# Altium PCB DoubleBLDC.PcbDoc
Units mm, origin at the board's own origin, x right, y up, seen from the top; angles counter-clockwise.
Board outline 158.11 x 143.13 mm, 2 copper layers (Top Layer, Bottom Layer); 105 components, 104 nets, 426 pads, 60 vias.
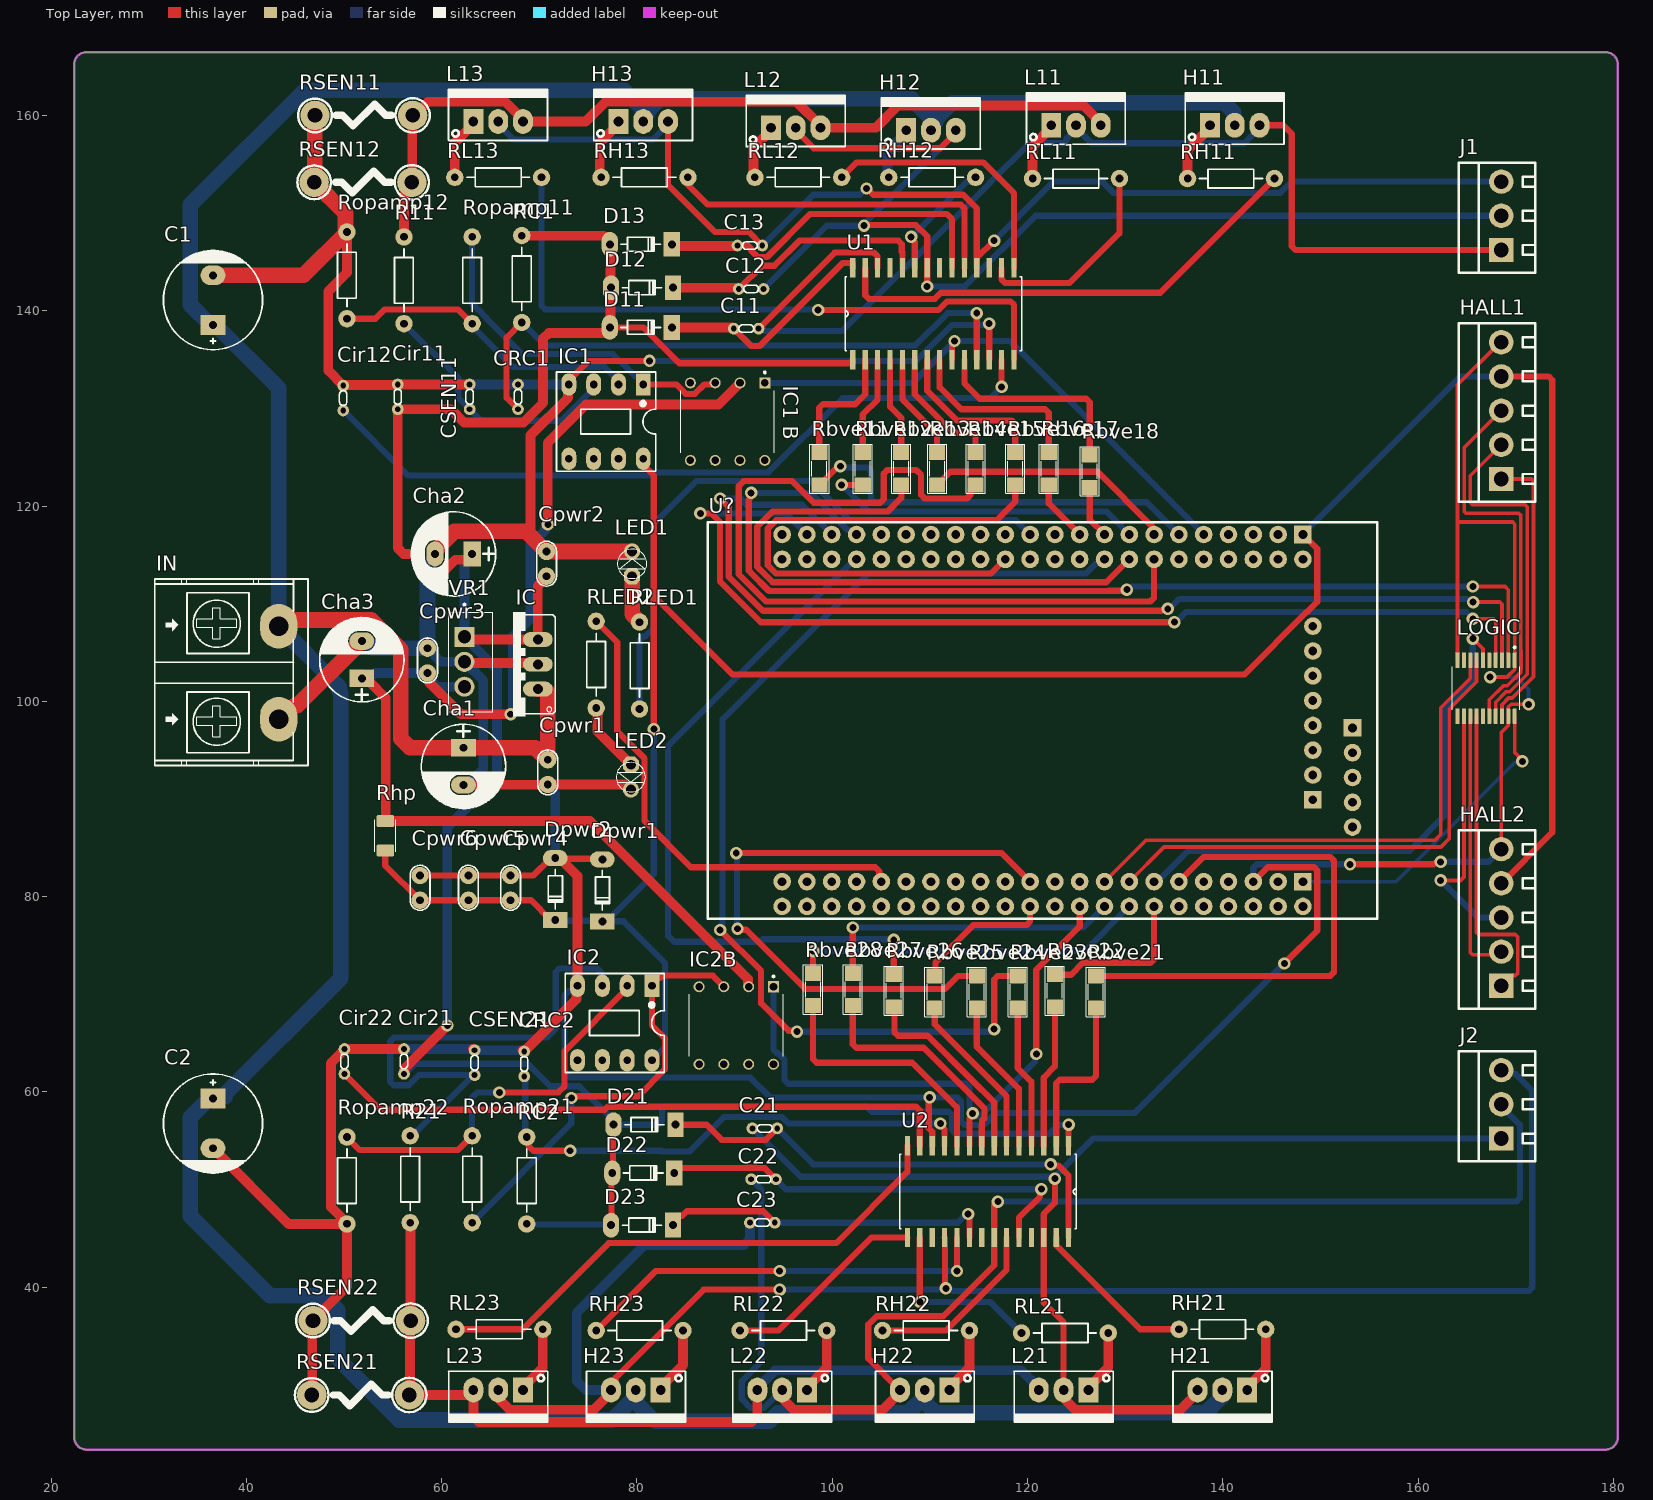
[diagram p0: Top Layer view]
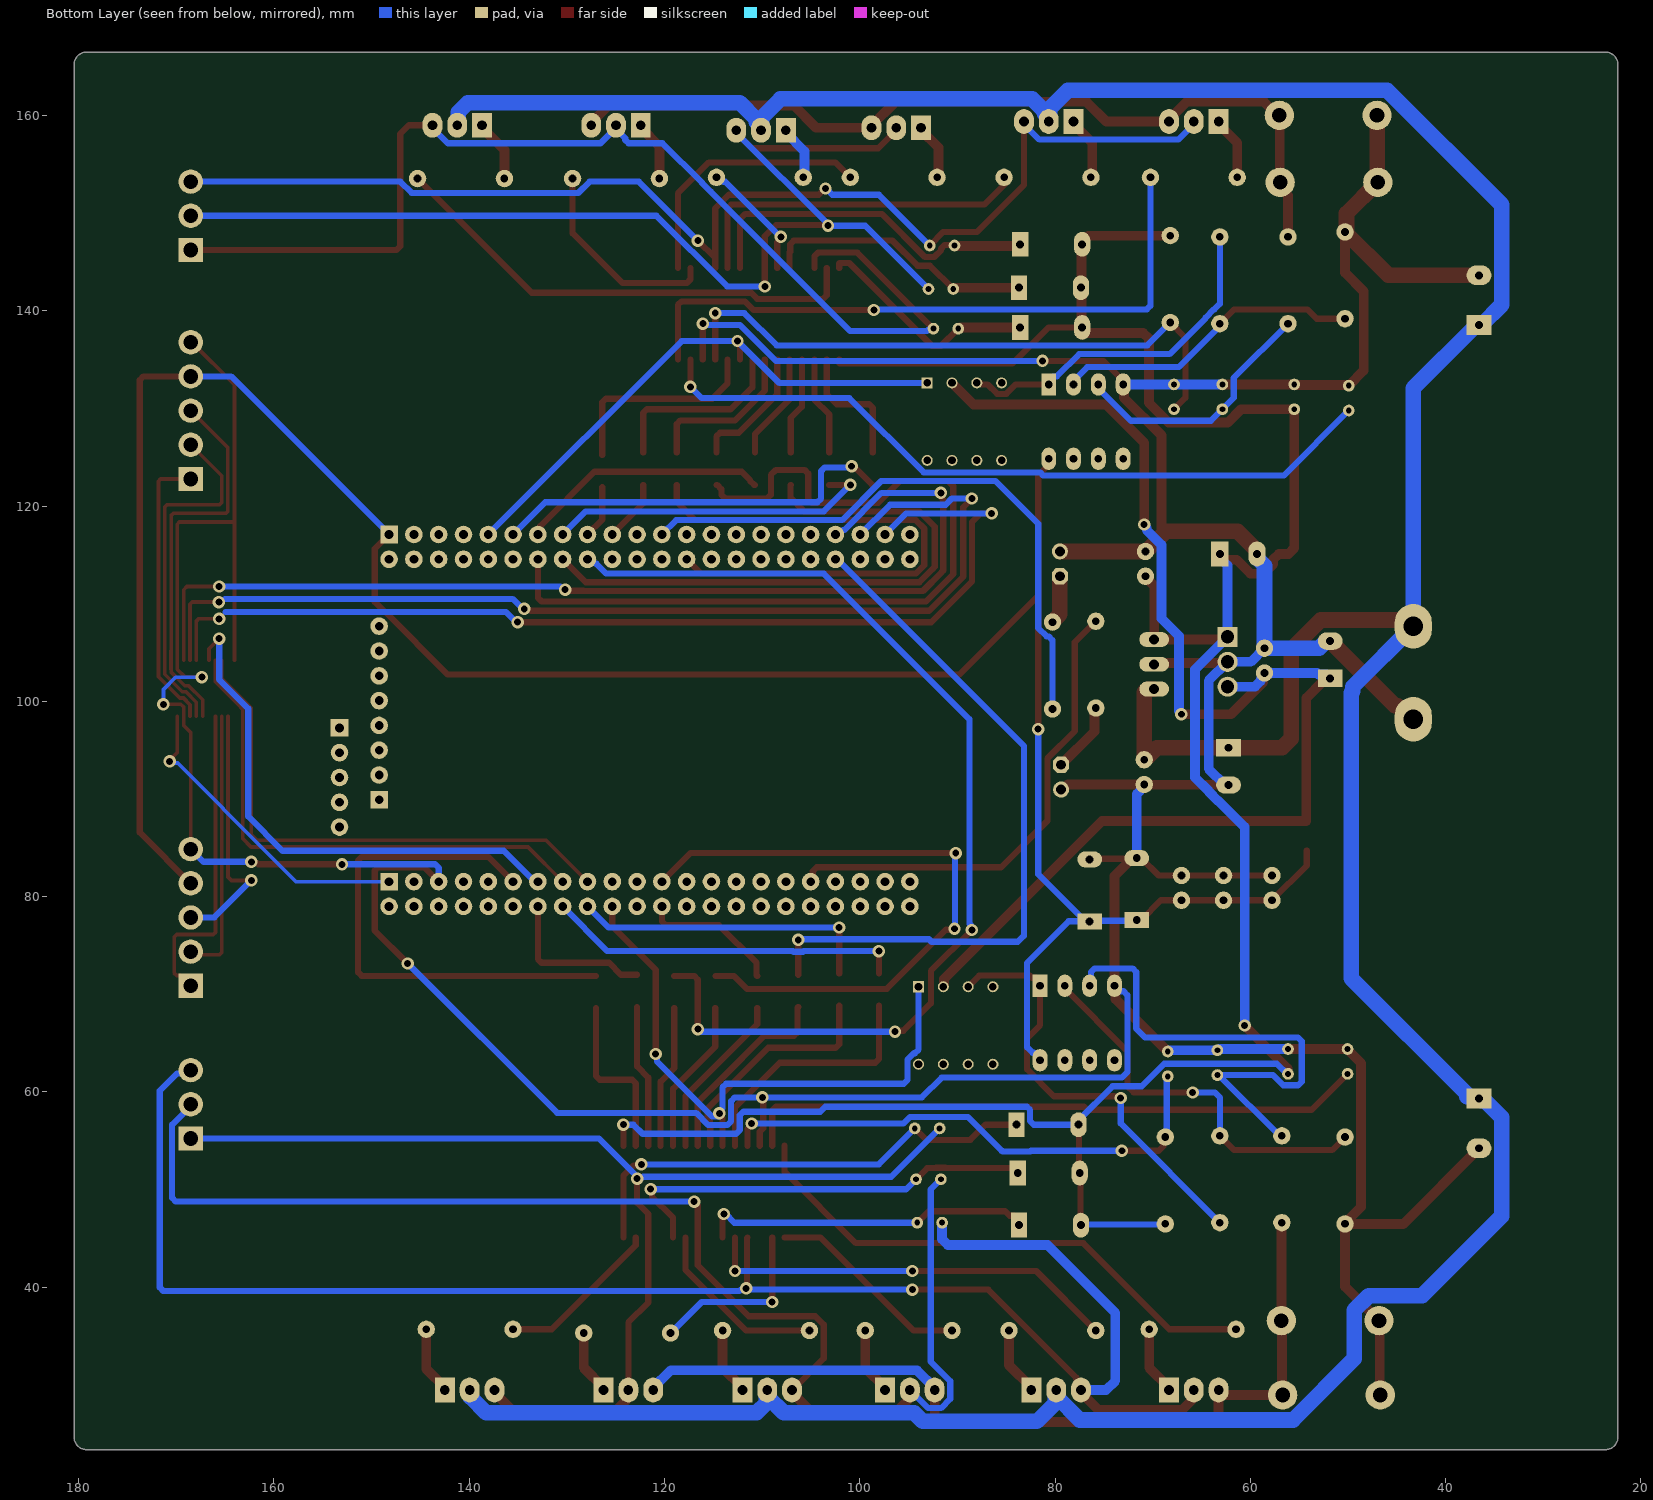
[diagram p1: Bottom Layer view, seen from below]

## Layer stack, top to bottom
Top Solder: solder mask 0.0102, Solder Resist, Dk 3.5
Top Layer: signal copper 0.0356
Dielectric 1: dielectric 0.32, FR-4, Dk 4.8
Bottom Layer: signal copper 0.0356
Bottom Solder: solder mask 0.0102, Solder Resist, Dk 3.5

## Board outline
22.352,24.638 22.352,165.227 cw(c23.622,165.227) 23.622,166.497 179.197,166.497 cw(c179.197,165.227) 180.467,165.227 180.467,24.638 cw(c179.197,24.638) 179.197,23.368 23.622,23.368 cw(c23.622,24.638)

## Design rules (kind name [scope] priority, off if disabled: settings)
Clearance [All] p1: gap=0.254 ignorepadtopadclearanceinfootprint=TRUE
PolygonConnect [All] p1: connectstyle=Relief reliefconductorwidth=0.254 reliefentries=4 polygonreliefangle="90 Angle" airgapwidth=0.254
RoutingVias [All] p1: holewidth=0.711 width=1.27 viastyle="Through Hole" minholewidth=0.711 minwidth=1.27 maxholewidth=0.711 maxwidth=1.27
SolderMaskExpansion [All] p1: expansion=0.102 istentingtop=FALSE
SupplyNets "Schematic Supply Nets" [InNet('GND')] p1: voltage=0.000
Width [All] p1: maxlimit=1.6 minlimit=0.254 preferedwidth=1.6
30 further rules are at their usual default settings.

## Classes and differential pairs
net class "SENSE Motor 2[1..3]": "SENSE Motor 21" "SENSE Motor 22" "SENSE Motor 23"
net class "SENSE Motor 1[1..3]": "SENSE Motor 11" "SENSE Motor 12" "SENSE Motor 13"
net class "Motor 2[1..9]": "Motor 21" "Motor 22" "Motor 23" "Motor 24" "Motor 25" "Motor 26" "Motor 27" "Motor 28" "Motor 29"
net class "Motor 1[1..9]": "Motor 11" "Motor 12" "Motor 13" "Motor 14" "Motor 15" "Motor 16" "Motor 17" "Motor 18" "Motor 19"
component class VĐK: LOGIC U?
component class Power: Cha1 Cha2 Cha3 Cpwr1 Cpwr2 Cpwr3 Cpwr4 Cpwr5 Cpwr6 Dpwr1 Dpwr2 IC IN Rhp VR1
component class Motor2: C2 C21 C22 C23 Cir21 Cir22 CRC2 CSEN21 D21 D22 D23 H21 H22 H23 HALL2 IC2 IC2B J2 L21 L22 L23 LED2 R21 Rbve21 Rbve22 Rbve23 Rbve24 Rbve25 Rbve26 Rbve27 Rbve28 RC2 RH21 RH22 RH23 RL21 RL22 RL23 RLED2 Ropamp21 Ropamp22 RSEN21 RSEN22 U2
component class Motor1: C1 C11 C12 C13 Cir11 Cir12 CRC1 CSEN11 D11 D12 D13 H11 H12 H13 HALL1 IC1 "IC1 B" J1 L11 L12 L13 LED1 R11 Rbve11 Rbve12 Rbve13 Rbve14 Rbve15 Rbve16 Rbve17 Rbve18 RC1 RH11 RH12 RH13 RL11 RL12 RL13 RLED1 Ropamp11 Ropamp12 RSEN11 RSEN12 U1

## Components (designator, comment, footprint, x,y, rotation, side; value= is the part's Value field where it differs from the comment)
C1 "2200uF/16V" CP2/4 36.576,138.557 r90 top
C2 "2200uF/16V" CP2/4 36.576,59.309 r270 top
C11 "Capacitor Ceramic" Tu-pico 89.916,138.176 r0 top value=220nf
C12 "Capacitor Ceramic" Tu-pico 90.424,142.24 r0 top value=220nf
C13 "Capacitor Ceramic" Tu-pico 90.297,146.685 r0 top value=220nf
C21 "Capacitor Ceramic" Tu-pico 94.361,56.261 r180 top value=220nf
C22 "Capacitor Ceramic" Tu-pico 94.234,51.054 r180 top value=220nf
C23 "Capacitor Ceramic" Tu-pico 94.107,46.609 r180 top value=220nf
Cha1 "470uF" CP1.5/3.4 62.23,95.25 r270 top value=1000uF/16V
Cha2 "470uF" CP1.5/3.4 63.119,115.1 r180 top value=1000uF/16V
Cha3 "470uF" CP1.5/3.4 51.816,102.362 r90 top value=1000uF/16V
Cir11 "Capacitor Ceramic" Tu-pico 55.499,129.921 r90 top value=0.1uF
Cir12 "Capacitor Ceramic" Tu-pico 49.911,129.794 r90 top value=0.047uF
Cir21 "Capacitor Ceramic" Tu-pico 56.134,61.849 r90 top value=0.1uF
Cir22 "Capacitor Ceramic" Tu-pico 50.038,61.849 r90 top value=0.047uF
Cpwr1 "100pF" CN1 70.866,94.018 r270 top
Cpwr2 "100pF" CN1 70.739,112.814 r90 top
Cpwr3 "100pF" CN1 58.547,102.908 r90 top
Cpwr4 "100pF" CN1 67.056,79.627 r90 top
Cpwr5 "100pF" CN1 62.738,79.627 r90 top
Cpwr6 "100pF" CN1 57.785,79.627 r90 top
CRC1 "Capacitor Ceramic" Tu-pico 67.818,129.921 r90 top value=0.1uF
CRC2 "Capacitor Ceramic" Tu-pico 68.453,61.595 r90 top value=0.1uF
CSEN11 "Capacitor Ceramic" Tu-pico 62.865,129.921 r90 top value=10uF
CSEN21 "Capacitor Ceramic" Tu-pico 63.373,61.722 r90 top value=10uF
D11 "1N4148" D0.5A 80.391,138.303 r180 top
D12 "1N4148" D0.5A 80.518,142.367 r180 top
D13 "1N4148" D0.5A 80.391,146.812 r180 top
D21 "1N4148" D0.5A 80.772,56.642 r180 top
D22 "1N4148" D0.5A 80.645,51.689 r180 top
D23 "1N4148" D0.5A 80.518,46.355 r180 top
Dpwr1 "1N4007" D0.5A 76.454,80.645 r90 top
Dpwr2 "1N4007" D0.5A 71.628,80.772 r90 top
H11 "IRF840" QTO-220 138.684,159.004 r0 top
H12 "IRF840" QTO-220 107.569,158.496 r0 top
H13 "IRF840" QTO-220 78.105,159.385 r0 top
H21 "IRF840" QTO-220 142.494,29.464 r180 top
H22 "IRF840" QTO-220 112.014,29.464 r180 top
H23 "IRF840" QTO-220 82.423,29.464 r180 top
HALL1 "KF350-5P" KF350-5P 168.529,122.779 r90 top
HALL2 "KF350-5P" KF350-5P 168.529,70.866 r90 top
IC "L7812" 78XXS 67.31,103.797 r90 top
IC1 "LM358" DIP8/W0.3 80.645,132.461 r180 top
"IC1 B" "LM358P" DIP794W45P254L959H508Q8 89.281,128.651 r270 top
IC2 "LM358" DIP8/W0.3 81.534,70.866 r180 top
IC2B "LM358P" DIP794W45P254L959H508Q8 90.17,66.802 r270 top
IN "CON 2 HB9500" "CON 2 HB9500" 43.307,102.933 r270 top
J1 "KF350-3P" KF350-3P 168.529,146.233 r90 top
J2 "KF350-3P" KF350-3P 168.529,55.23 r90 top
L11 "IRF840" QTO-220 122.428,159.004 r0 top
L12 "IRF840" QTO-220 93.726,158.75 r0 top
L13 "IRF840" QTO-220 63.246,159.385 r0 top
L21 "IRF840" QTO-220 126.238,29.464 r180 top
L22 "IRF840" QTO-220 97.409,29.464 r180 top
L23 "IRF840" QTO-220 68.326,29.464 r180 top
LED1 "LED 3mm" LED-3MM-YELLOW 79.502,112.814 r90 top
LED2 "LED 3mm" LED-3MM-YELLOW 79.375,93.51 r270 top
LOGIC "SN74LVC245APW" SOP65P640X120-20N 166.971,101.346 r270 top
R11 "10" R1/4W 56.134,147.574 r270 top value="R1/4W - 1K"
R21 "10" R1/4W 56.769,46.609 r90 top value="R1/4W - 1K"
Rbve11 "1m" SM-1206 98.679,123.825 r270 top value="R1/4W - 1K"
Rbve12 "1m" SM-1206 103.124,123.825 r270 top value="R1/4W - 1K"
Rbve13 "1m" SM-1206 107.061,123.825 r270 top value="R1/4W - 1K"
Rbve14 "1m" SM-1206 110.744,123.825 r270 top value="R1/4W - 1K"
Rbve15 "1m" SM-1206 114.681,123.825 r270 top value="R1/4W - 1K"
Rbve16 "1m" SM-1206 118.745,123.825 r270 top value="R1/4W - 1K"
Rbve17 "1m" SM-1206 122.174,123.825 r270 top value="R1/4W - 1K"
Rbve18 "1m" SM-1206 126.365,123.571 r270 top value="R1/4W - 1K"
Rbve21 "1m" SM-1206 127,70.231 r90 top value="R1/4W - 1K"
Rbve22 "1m" SM-1206 122.809,70.358 r90 top value="R1/4W - 1K"
Rbve23 "1m" SM-1206 118.999,70.231 r90 top value="R1/4W - 1K"
Rbve24 "1m" SM-1206 114.808,70.231 r90 top value="R1/4W - 1K"
Rbve25 "1m" SM-1206 110.49,70.231 r90 top value="R1/4W - 1K"
Rbve26 "1m" SM-1206 106.299,70.358 r90 top value="R1/4W - 1K"
Rbve27 "1m" SM-1206 102.108,70.485 r90 top value="R1/4W - 1K"
Rbve28 "1m" SM-1206 98.044,70.485 r90 top value="R1/4W - 1K"
RC1 "2.2M" R1/4W 68.199,138.811 r90 top value="R1/4W - 1K"
RC2 "2.2M" R1/4W 68.707,55.372 r270 top value="R1/4W - 1K"
RH11 "10" R1/4W 145.288,153.543 r180 top value="R1/4W - 1K"
RH12 "10" R1/4W 114.681,153.67 r180 top value="R1/4W - 1K"
RH13 "10" R1/4W 85.217,153.67 r180 top value="R1/4W - 1K"
RH21 "10" R1/4W 135.509,35.687 r0 top value="R1/4W - 1K"
RH22 "10" R1/4W 105.156,35.56 r0 top value="R1/4W - 1K"
RH23 "10" R1/4W 75.819,35.56 r0 top value="R1/4W - 1K"
Rhp "0ZCA0100FF2E" RESC3216X125N 54.229,86.233 r270 top
RL11 "10" R1/4W 129.413,153.543 r180 top value="R1/4W - 1K"
RL12 "10" R1/4W 100.965,153.67 r180 top value="R1/4W - 1K"
RL13 "10" R1/4W 61.341,153.67 r0 top value="R1/4W - 1K"
RL21 "10" R1/4W 119.38,35.306 r0 top value="R1/4W - 1K"
RL22 "10" R1/4W 90.551,35.56 r0 top value="R1/4W - 1K"
RL23 "10" R1/4W 70.358,35.687 r180 top value="R1/4W - 1K"
RLED1 "10" R1/4W 80.264,108.115 r270 top value="R1/4W - 1K"
RLED2 "10" R1/4W 75.819,99.314 r90 top value="R1/4W - 1K"
Ropamp11 "240k" R1/4W 63.119,147.574 r270 top value="R1/4W - 1K"
Ropamp12 "10k" R1/4W 50.292,139.192 r90 top value="R1/4W - 1K"
Ropamp21 "240k" R1/4W 63.119,46.609 r90 top value="R1/4W - 1K"
Ropamp22 "10k" R1/4W 50.292,55.372 r270 top value="R1/4W - 1K"
RSEN11 "10mR" "Shunt 10mR 1.2x10x7MM" 52.023,160.02 r0 top
RSEN12 "10mR" "Shunt 10mR 1.2x10x7MM" 51.943,153.162 r0 top
RSEN21 "10mR" "Shunt 10mR 1.2x10x7MM" 51.689,28.956 r0 top
RSEN22 "10mR" "Shunt 10mR 1.2x10x7MM" 51.816,36.576 r0 top
U1 "IR2136S" SOIC127PX1032X265-28N 110.363,139.7 r90 top
U2 "IR2136S" SOIC127PX1032X265-28N 115.951,49.784 r270 top
U? "STM32F407VGT6" STM32F407VGT6 148.209,117.094 r270 top
VR1 "L7805" TO255P1020X450X2000-3 62.992,104.051 r270 top

## Footprints (in the part's own frame and the unit in brackets; to place one, negate y for a bottom-side part, rotate by r counter-clockwise, add the part's x,y. Pads: shape width x height; smd on the part's side, far side on the other; paste and mask are expansions set on the pad)
78XXS [mil]
  oval 60x120 hole 40: GND(0,-100) IN(-100,-100) OUT(100,-100)
  silkscreen extent -210,-170 210,0
CN1 [mil]
  round 70 hole 31: 1(0,0) 2(100,0)
  silkscreen extent -40,-40 141,40, body extent -60,-30 170,37, height 265
"CON 2 HB9500" [mil] "Header 2: 300V-20A, 2 pin, hight 300mil, Pin to Pin 400, Colour Green"
  oval 180x150 hole 80: 1(-187.5,0) 2(187.5,0)
  silkscreen extent -378,-500 374,118, body extent -366,-485 345,115, height 501
CP1.5/3.4 [mil] "Tu hoa 220->470uF,16V, 470uF/16V,25V"
  rect 70x100 hole 32: 1(0,0)
  oval 70x100 hole 32: 2(150,0)
  silkscreen extent -95,-170 245,170, body extent -85,-157 230,157, height 446
CP2/4 [mil] "Tu hoa 1000uF/16V/25V"
  rect 80x100 hole 32: 1(0,0)
  oval 80x100 hole 32: 2(200,0)
  silkscreen extent -100,-200 300,200, body extent -107,-206 305,206, height 689
D0.5A [mil] "Diode muoi, W 80mil, L 300mil"
  oval 65x100 hole 32: 1(125,0)
  rect 65x100 hole 32: 2(-125,0)
  silkscreen extent -80,-30 80,28, body extent -108,-33 108,32, height 61
DIP8/W0.3 [mil] "8 PIN, W 300mil, Pin to pin 100mil"
  rect 60x90 hole 31: 1(0,0)
  oval 60x90 hole 31: 2(100,0) 3(200,0) 4(300,0) 5(300,300) 6(200,300) 7(100,300) 8(0,300)
  silkscreen extent -50,-50 350,350, body extent -50,-40 350,336, height 201
DIP794W45P254L959H508Q8 [mm]
  rect 1.13x1.13 / inner round 1.13 / far side rect 1.13x1.13 hole 0.78: 1(-3.97,3.81)
  round 1.13 hole 0.78: 2(-3.97,1.27) 3(-3.97,-1.27) 4(-3.97,-3.81) 5(3.97,-3.81) 6(3.97,-1.27) 7(3.97,1.27) 8(3.97,3.81)
  silkscreen extent -5.13,-4.79 3.18,4.79, body extent -4.1,-4.79 4.1,4.79, height 5.08
KF350-3P [mm] "¿ÉÆ´½Ó¶Ë×Ó/10A"
  rect 2.5x2.5 hole 1.5: 1(0,0)
  round 2.5 hole 1.5: 2(3.5,0) 3(7,0)
  silkscreen extent -2.34,-3.48 8.94,4.37, body extent -2.15,-3.34 8.75,4.16, height 10
KF350-5P [mm] "¿ÉÆ´½Ó¶Ë×Ó/10A"
  rect 2.5x2.5 hole 1.5: 1(0,0)
  round 2.5 hole 1.5: 2(3.5,0) 3(7,0) 4(10.5,0) 5(14,0)
  silkscreen extent -2.34,-3.48 15.93,4.37, body extent -2.15,-3.34 15.75,4.16, height 10
LED-3MM-YELLOW [mil]
  oct 65x65 hole 40: 1(0,0)
  round 65 hole 40: 2(100,0)
  silkscreen extent -9,-59 109,59, body extent -27,-77 117,80, height 181
QTO-220 [mil] "TO-220 - 1-2-3"
  rect 80x100 hole 39: 1(0,0)
  oval 80x100 hole 39: 2(100,0) 3(200,0)
  silkscreen extent -100,-76 300,130, body extent -119,-64 322,121, height 755
R1/4W [mil] "R 1/4W, 2 Pin, 350mil"
  round 70 hole 31: 1(0,0) 2(350,0)
  silkscreen extent 48,-38 302,38, body extent -40,-47 386,47, height 111
RESC3216X125N [mm]
  rrect25% 1.2x1.82 smd: 1(-1.505,0) 2(1.505,0)
  silkscreen extent -1.63,-1.09 1.63,1.09, body extent -1.63,-0.82 1.63,0.82, height 0.43
"Shunt 10mR 1.2x10x7MM" [mm]
  round 3 hole 1.5: 1(-5,0) 2(5,0)
  silkscreen extent -6.72,-1.76 6.76,1.76
SM-1206 [mil] "Compoment SMD 120x60mil"
  rect 60x65 smd: 1(-65,0) 2(65,0)
  silkscreen extent -99,-38 99,39, body extent -83,-35 83,36, height 25
SOIC127PX1032X265-28N [mil]
  rect 78x21 smd: 1(-185,325) 2(-185,275) 3(-185,225) 4(-185,175) 5(-185,125) 6(-185,75) 7(-185,25) 8(-185,-25) 9(-185,-75) 10(-185,-125) 11(-185,-175) 12(-185,-225) 13(-185,-275) 14(-185,-325) 15(185,-325) 16(185,-275) 17(185,-225) 18(185,-175) 19(185,-125) 20(185,-75) 21(185,-25) 22(185,25) 23(185,75) 24(185,125) 25(185,175) 26(185,225) 27(185,275) 28(185,325)
  silkscreen extent -150,-356 150,356
SOP65P640X120-20N [mm]
  rrect25% 1.57x0.41 smd: 1(-2.87,2.925) 2(-2.87,2.275) 3(-2.87,1.625) 4(-2.87,0.975) 5(-2.87,0.325) 6(-2.87,-0.325) 7(-2.87,-0.975) 8(-2.87,-1.625) 9(-2.87,-2.275) 10(-2.87,-2.925) 11(2.87,-2.925) 12(2.87,-2.275) 13(2.87,-1.625) 14(2.87,-0.975) 15(2.87,-0.325) 16(2.87,0.325) 17(2.87,0.975) 18(2.87,1.625) 19(2.87,2.275) 20(2.87,2.925)
  silkscreen extent -4.29,-3.45 2.2,3.45, body extent -3.2,-3.25 3.2,3.25, height 1.2
STM32F407VGT6 [mm]
  rect 1.8x1.8 hole 0.9 paste-2539.97: 1(0,0)
  round 1.8 hole 0.9: 2(0,-2.54) 3(0,-5.08) 4(0,-7.62) 5(0,-10.16) 6(0,-12.7) 7(0,-15.24) 8(0,-17.78) 9(0,-20.32) 10(0,-22.86) 11(0,-25.4) 12(0,-27.94) 13(0,-30.48) 14(0,-33.02) 15(0,-35.56) 16(0,-38.1) 17(0,-40.64) 18(0,-43.18) 19(0,-45.72) 20(0,-48.26) 21(0,-50.8) 22(0,-53.34) 23(2.54,0) 24(2.54,-2.54) 25(2.54,-5.08) 26(2.54,-7.62) 27(2.54,-10.16) 28(2.54,-12.7) 29(2.54,-15.24) 30(2.54,-17.78) 31(2.54,-20.32) 32(2.54,-22.86) 33(2.54,-25.4) 34(2.54,-27.94) 35(2.54,-30.48) 36(2.54,-33.02) 37(2.54,-35.56) 38(2.54,-38.1) 39(2.54,-40.64) 40(2.54,-43.18) 41(2.54,-45.72) 42(2.54,-48.26) 43(2.54,-50.8) 44(2.54,-53.34) 46(35.56,-2.54) 47(35.56,-5.08) 48(35.56,-7.62) 49(35.56,-10.16) 50(35.56,-12.7) 51(35.56,-15.24) 52(35.56,-17.78) 53(35.56,-20.32) 54(35.56,-22.86) 55(35.56,-25.4) 56(35.56,-27.94) 57(35.56,-30.48) 58(35.56,-33.02) 59(35.56,-35.56) 60(35.56,-38.1) 61(35.56,-40.64) 62(35.56,-43.18) 63(35.56,-45.72) 64(35.56,-48.26) 65(35.56,-50.8) 66(35.56,-53.34) 67(38.1,0) 67(38.1,0) 68(38.1,-2.54) 69(38.1,-5.08) 70(38.1,-7.62) 71(38.1,-10.16) 72(38.1,-12.7) 73(38.1,-15.24) 74(38.1,-17.78) 75(38.1,-20.32) 76(38.1,-22.86) 77(38.1,-25.4) 78(38.1,-27.94) 79(38.1,-30.48) 80(38.1,-33.02) 81(38.1,-35.56) 82(38.1,-38.1) 83(38.1,-40.64) 84(38.1,-43.18) 85(38.1,-45.72) 86(38.1,-48.26) 87(38.1,-50.8) 88(38.1,-53.34) 89(29.972,5.08) 90(27.432,5.08) 91(24.892,5.08) 92(22.352,5.08) 95(24.638,1.016) 96(22.098,1.016) 97(19.558,1.016) 98(17.018,1.016) 99(14.478,1.016) 100(11.938,1.016) 101(9.398,1.016)
  rect 1.8x1.8 hole 0.9: 45(35.56,0) 93(19.812,5.08) 94(27.178,1.016)
  silkscreen extent -1.27,-60.96 39.37,7.62
TO255P1020X450X2000-3 [mm]
  rect 2.055x2.055 / inner round 2.055 / far side rect 2.055x2.055 hole 1.37: 1(-2.55,-0.663)
  round 2.055 hole 1.37: 2(0,-0.663) 3(2.55,-0.663)
  silkscreen extent -5.95,-2.25 5.1,2.25, body extent -5.1,-2.25 5.1,2.25, height 20
Tu-pico [mm] "Tu gom mini"
  round 1.2 hole 0.6: 1(0,0) 2(2.54,0)
  silkscreen extent 0.51,-0.38 2.03,0.38, body extent -1.65,-0.85 4.19,0.85, height 6.12

## Part data
C1 C2: library part CP5, "Cap 2200uF/16V - 1000uF/50V", Description 1="4700uF-6800uF/6,3V - 3300uF-4700uF/10V", Description 2="2200uF-3300uF/16V - 470uF => 2200uF/25V", Description 3=1000uF/35V-50V_470uF/63V_220uF>330uF/100V, Description 4="47uF => 100uF/160V - 33uF-47uF/250V", Description 5="47uF/200V - 22uF/350V - 400V - 10uF/450V"
C11 C12 C13 C21 C22 C23 Cir11 Cir12 Cir21 Cir22 CRC1 CRC2 CSEN11 CSEN21: library part CapCeramic, "Capacitor", LatestRevisionDate=17-Jul-2002, LatestRevisionNote="Re-released for DXP Platform.", PackageReference=RAD-0.3, Published=8-Jun-2000, Publisher="Altium Limited"
Cha1 Cha2 Cha3: library part CP4, "Cap 1000uF/16V - 220uF/50V", Description 1="2200uF-3300uF/6,3V - 1000uF-2200uF/10V", Description 2="1000uF/16V - 470uF => 1000uF/25V - 100uF/100V", Description 3=330uF>470uF/35V_220uF>470uF/50V_10uF>22uF/250V, Description 4="220uF => 330uF/63V - 10uF =>33uF/160 - 200V", Description 5="4,7uF>10uF/250V_3,3uF>10uF/400V - 2,2uF>4,7uF/450V"
Cpwr1 Cpwr2 Cpwr3 Cpwr4 Cpwr5 Cpwr6: library part CN1, "Cap np  1pF - 472pF"
D11 D12 D13 D21 D22 D23: library part D0.5A, "D0.5A"
Dpwr1 Dpwr2: library part D1A, "Diode 1A"
H11 H12 H13 H21 H22 H23 L11 L12 L13 L21 L22 L23: "MOSFET N - CHANNEL 500V - 0.75 - 8A - TO-220"
IC: "Linear Voltage Regulator IC 1 Output 1.5A D2PAK", Package="D2PAK STMicroelectronics", Availability=Unavailable, MF=STMicroelectronics, MP=L7812, Price=None, SnapEDA_Link=https://www.snapeda.com/parts/L7812/STMicroelectronics/view-part/562240/?ref=snap
IC1 IC2: "Low-Power Dual Operational Amplifier"
"IC1 B" IC2B: "Dual, 30-V, 700-kHz operational amplifier", Package="PDIP-8 Texas", Check_prices=https://www.snapeda.com/parts/LM358P/Texas+Instruments/view-part/?ref=eda, MF="Texas Instruments", MP=LM358P, SnapEDA_Link=https://www.snapeda.com/parts/LM358P/Texas+Instruments/view-part/?ref=snap
IN: "Cắm", Chung_Loai=Cắm, Don_Vi=Con, Ma_Hang=MH002054, Ten_Linh_Kien="CON 2 HB9500-2P 9.5MM"
LED1 LED2: library part "LED 3mm Vang", "Cắm", Chung_Loai=Cắm, Don_Vi=Con, Ma_Hang=MH003893, Ten_Linh_Kien="Led 3MM Phủ Vàng (10c)"
LOGIC: "Octal Bus Transceiver With 3-State Outputs 20-TSSOP -40 to 125", Package="TSSOP-20 Texas Instruments", Availability=Warning, Check_prices=https://www.snapeda.com/parts/SN74LVC245APW/Texas%20Instruments/view-part/318075/?ref=eda, MF="Texas Instruments", MP=SN74LVC245APW, Price=None, Purchase-URL=https://pricing.snapeda.com/search/part/SN74LVC245APW/?ref=eda, SnapEDA_Link=https://www.snapeda.com/parts/SN74LVC245APW/Texas%20Instruments/view-part/318075/?ref=snap
R11 R21 RC1 RC2 RH11 RH12 RH13 RH21 RH22 RH23 RL11 RL12 RL13 RL21 RL22 RL23 RLED1 RLED2 Ropamp11 Ropamp12 Ropamp21 Ropamp22: library part R1/4W, "Resistor 1/4W"
Rbve11 Rbve12 Rbve13 Rbve14 Rbve15 Rbve16 Rbve17 Rbve18 Rbve21 Rbve22 Rbve23 Rbve24 Rbve25 Rbve26 Rbve27 Rbve28: library part R, "Resistor 1/4W"
Rhp: "Polymeric PTC Resettable Fuse 6V 1 A Ih Surface Mount 1206 (3216 Metric), Concave", Package="1206 Bel Fuse", Availability="In Stock", Check_prices=https://www.snapeda.com/parts/0ZCA0100FF2E/Bel+Fuse+Inc./view-part/?ref=eda, MF="Bel Fuse", MP=0ZCA0100FF2E, Price=None, Purchase-URL=https://pricing.snapeda.com/search/part/0ZCA0100FF2E/?ref=eda, SnapEDA_Link=https://www.snapeda.com/parts/0ZCA0100FF2E/Bel+Fuse+Inc./view-part/?ref=snap
RSEN11 RSEN12 RSEN21 RSEN22: library part "Shunt 10mR 1.2x10x7MM", "Shunt 10mR 1.2x10x7MM"
U1 U2: "IC Ä‘iá»u khiá»ƒn ná»­a cáº§u cá»•ng Ä‘áº£o ngÆ°á»£c 28-SOIC", Package="SOIC-28 Infineon", Availability=Unavailable, MF=Infineon, MP=IR2136S, Price=None, SnapEDA_Link=https://www.snapeda.com/parts/IR2136S/Infineon%20Technologies/view-part/652863/?ref=snap
VR1: "Standard Regulator Pos 5V 1.5A 3-Pin(3+Tab) TO-220FP Tube", Package=None, Availability="Not in stock", Check_prices=https://www.snapeda.com/parts/L7805/STMicroelectronics/view-part/?ref=eda, MF=STMicroelectronics, MP=L7805, Price=None, SnapEDA_Link=https://www.snapeda.com/parts/L7805/STMicroelectronics/view-part/?ref=snap

## Via types
v1: diameter 1.27, hole 0.711, Top Layer to Bottom Layer, 60 vias

## Nets (pads, with @x,y where several pads share a name; then routed paths per layer and width w, separated by ;. In a path a pad name is that pad's centre, name@x,y a point inside that pad or via, vN(x,y) a via of type N, cw(c..) or ccw(c..) an arc to the next point about the centre after c; other vN are vias at no path point)
5V: "IC1 B.2" Cha3.1 Cpwr3.1 IC2B.2 Rhp.1 VR1.3 | length 134.4
  Top Layer w1: Cha3.1@51.83,102.376 52.234,101.973 52.633,101.973 54.261,100.344 54.261,87.752 75.2,87.752 91.375,71.577 91.375,70.872 91.429,70.819 IC2B.2@91.44,70.819 ; Cpwr3.1 58.696,102.759 58.696,101.959 61.976,98.679 v1(67.056,98.679) ; v1(70.866,118.11) 70.866,126.492 74.787,130.413 88.343,130.413 90.551,132.621
  Bottom Layer w1: Cha3.1 52.205,102.751 53.015,102.751 53.172,102.908 Cpwr3.1 58.547,102.698 58.936,102.309 58.936,102.087 59.522,101.501 VR1.3 ; v1(67.056,98.679) 67.056,98.752 67.31,99.006 67.31,106.703 69.096,108.489 69.096,116.035 70.612,117.551 70.612,117.783 70.866,118.037 v1(70.866,118.11)
+12: Cha2.1 Cir11.1 Cir21.1 Cpwr2.1 D11.1 D12.1 D13.1 D21.1 D22.1 D23.1 IC.OUT RC1.2 RC2.2 U1.1 U2.1 VR1.1 | length 269.1
  Top Layer w0.635: D11.1 80.662,138.303 84.345,134.62 102.057,134.62 102.108,134.671 U1.1 ; D23.1@77.406,46.419 D22.1@77.406,51.625 ; D22.1@77.534,51.752 D21.1@77.534,56.578 ; U2.1 v1(124.206,56.642)
  Top Layer w1: Cir21.1 56.172,61.887 56.172,62.395 v1(60.579,66.802) ; VR1.1 62.593,106.337 IC.OUT 69.85,111.839 70.739,112.728 Cpwr2.1 ; Cha2.1 63.119,114.902 62.73,114.513 61.426,114.513 59.99,113.076 58.628,113.076 57.666,114.039 57.666,114.514 57.08,115.1 56.085,115.1 55.499,115.686 Cir11.1 60.95,129.921 62.304,128.567 68.379,128.567 70.388,130.576 70.388,137.148 70.974,137.734 76.915,137.734 77.216,138.035 D11.1 ; RC1.2 76.595,147.701 77.216,147.08 D13.1 77.279,146.749 77.279,142.43 D12.1 77.279,142.303 D11.1@77.279,138.367
  Bottom Layer w0.635: Cir21.1 56.241,61.849 57.285,62.894 68.811,62.894 71.126,60.579 74.105,60.579 77.597,57.087 D21.1 82.178,56.642 82.55,57.014 82.55,58.149 82.885,58.483 103.543,58.483 104.051,57.975 111.916,57.975 112.288,57.604 112.288,56.941 112.29,56.939 112.29,56.085 112.662,55.713 122.251,55.713 123.18,56.642 v1(124.206,56.642) ; RC2.2 68.77,46.419 77.279,46.419 D23.1 D23.1@77.406,46.419 ; D22.1@77.406,51.625 D22.1 D22.1@77.534,51.752
  Bottom Layer w1: v1(60.579,66.802) 60.579,87.122 63.254,89.797 63.292,89.797 64.254,90.759 64.254,90.797 65.659,92.202 65.659,103.272 VR1.1 62.329,113.93 63.119,114.719 Cha2.1
+24V: C1.1 C2.1 Cha1.1 Cpwr1.1 H11.2 H12.2 H13.2 H21.2 H22.2 H23.2 IC.IN IN.1 | length 408.3
  Top Layer w1.6: IN.1 43.942,108.331 52.786,108.331 55.815,105.302 55.815,96.187 56.753,95.25 Cha1.1 69.586,95.25 70.818,94.018 Cpwr1.1 70.866,100.927 70.536,101.257 IC.IN
  Bottom Layer w1.6: C2.1 36.36,59.093 35.958,59.093 34.252,57.387 34.252,47.282 42.404,39.13 47.874,39.13 49.37,37.634 49.37,32.663 55.631,26.402 77.462,26.402 H23.2@79.8,28.74 ; C1.1 36.322,138.557 34.252,140.627 34.252,150.861 45.965,162.574 78.693,162.574 80.562,160.704 80.562,159.468 H13.2 80.645,159.756 81.115,160.226 81.115,160.496 82.328,161.709 108.133,161.709 110.026,159.815 110.026,158.579 H12.2 110.109,158.867 110.579,159.337 110.579,159.607 112.3,161.328 140.137,161.328 141.141,160.323 141.141,159.087 H11.2 ; C1.1@36.83,138.557 43.307,132.08 IN.1@43.307,107.148 ; C2.1@37.808,59.525 37.808,59.779 49.657,71.628 49.657,100.871 49.492,101.036 49.492,101.511 IN.1 ; H23.2 79.966,29.381 79.966,28.145 81.859,26.251 93.555,26.251 94.444,27.14 107.791,27.14 H22.2@109.391,28.74 ; H22.2 109.557,29.381 109.557,28.145 110.561,27.14 138.271,27.14 139.871,28.74 139.871,29.381 H21.2
CS1: CSEN11.1 IC1.3 R11.2 | length 26.5
  Bottom Layer w0.635: R11.2 61.693,133.125 61.693,131.093 64.037,128.749 72.234,128.749 75.565,132.08 IC1.3
CS2: CSEN21.1 IC2.3 R21.2 | length 52.1
  Bottom Layer w0.635: R21.2 56.997,55.499 CSEN21.1@63.22,61.722 ; CSEN21.1 CSEN21.1@63.22,61.722 ; IC2.3 76.324,70.996 76.324,72.272 75.952,72.644 72.063,72.644 71.691,72.272 71.691,66.484 70.768,65.561 55.109,65.561 54.737,65.189 54.737,61.049 55.109,60.677 56.619,60.677 57.664,61.722 CSEN21.1@63.22,61.722
EN1: Rbve18.2 U?.9 | length 5.5
  Top Layer w0.635: Rbve18.2 126.365,118.618 U?.9
EN2: Rbve28.2 U?.74 | length 36.6
  Top Layer w0.635: Rbve28.2 v1(98.044,74.422)
  Bottom Layer w0.635: v1(98.044,74.422) 105.736,74.422 105.799,74.358 106.799,74.358 106.862,74.422 125.857,74.422 U?.74
FAULT1: Rbve17.2 U?.10 | length 6.4
  Top Layer w0.635: Rbve17.2 122.174,120.269 U?.10
FAULT2: Rbve27.2 U?.75 | length 31.4
  Top Layer w0.635: Rbve27.2 v1(102.108,76.835)
  Bottom Layer w0.635: v1(102.108,76.835) 125.73,76.835 U?.75
GND: C1.2 C2.2 Cha1.2 Cha2.2 Cha3.2 Cir11.2 Cir12.2 Cir21.2 Cir22.2 Cpwr1.2 Cpwr2.2 Cpwr3.2 Cpwr4.2 Cpwr5.2 Cpwr6.2 CRC1.2 CRC2.2 CSEN11.2 CSEN21.2 Dpwr1.1 Dpwr2.1 HALL1.5 HALL2.5 IC1.4 IC2.4 IC.GND IN.2 LED1.2 LED2.2 LOGIC.1 LOGIC.10 LOGIC.19 Ropamp12.2 Ropamp22.2 RSEN11.1 RSEN12.1 RSEN21.1 RSEN22.1 U1.12 U2.12 U?.47 VR1.2 | length 580.7
  Top Layer w0.381: LOGIC.10 164.046,118.326 ; v1(167.386,102.489) 169.108,102.489 169.896,103.277 LOGIC.1 ; HALL1.5@168.386,136.763 164.046,132.423 164.046,118.326 ; HALL2.5 168.529,96.82 169.246,97.537 LOGIC.19 169.247,98.477 169.247,99.415 169.537,99.706 171.312,99.706 v1(171.323,99.695) ; LOGIC.1 169.896,118.141 169.673,118.364 164.084,118.364 164.046,118.326
  Top Layer w0.635: Cir12.2 Cir12.2@49.974,132.398 ; Cir11.2@55.435,132.398 Cir11.2 ; Cpwr6.2 Cpwr5.2 Cpwr4.2 69.404,82.167 71.183,83.947 Dpwr2.1 ; Dpwr2.1@71.691,83.883 72.136,83.883 76.391,83.883 Dpwr1.1 ; IC1.4 73.025,132.842 75.057,134.874 v1(81.28,134.874) ; v1(109.982,59.436) 109.877,59.331 109.877,56.269 110.236,55.91 U2.12 ; U1.12 v1(116.078,138.684) ; U?.47 144.6,83.005 149.346,83.005 149.68,82.671 149.68,76.528 v1(146.304,73.152) ; v1(153.035,83.312) 161.617,83.312 161.749,83.444 162.184,83.444 v1(162.306,83.566)
  Top Layer w1: C2.2 44.323,46.482 Ropamp22.2 ; RSEN21.1 46.752,29.019 46.752,36.512 RSEN22.1 50.292,40.052 Ropamp22.2 ; Cir12.2@49.911,132.371 48.387,133.895 48.387,142.005 50.292,143.91 Ropamp12.2 ; Cir12.2@49.974,132.398 Cir11.2@55.435,132.398 ; Cir11.2 CSEN11.2 ; Cir21.2 Cir22.2 50.038,64.335 48.649,62.946 48.649,48.218 50.292,46.575 Ropamp22.2 ; Cha1.2 62.249,91.459 70.847,91.459 Cpwr1.2 ; VR1.2@62.456,103.924 IC.GND@69.723,103.924 ; CSEN21.2@63.192,64.389 63.319,64.262 CSEN21.2 ; CRC2.2@68.272,64.262 68.399,64.135 CRC2.2 73.814,69.496 73.814,70.766 IC2.4 73.914,82.105 72.136,83.883 72.072,83.947 Dpwr2.1 ; 69.088,117.005 69.088,127.254 72.925,131.091 72.925,132.361 IC1.4 ; Cpwr1.2@70.866,91.268 Cpwr1.2 ; LED2.2 79.199,90.97 78.691,91.478 Cpwr1.2
  Top Layer w1.6: C1.2 45.847,143.637 Ropamp12.2 50.143,148.231 50.143,149.962 RSEN12.1 46.983,153.202 46.983,159.98 RSEN11.1 ; IN.2 43.524,98.171 44.905,99.552 45.196,99.552 51.401,105.757 51.401,106.09 51.483,106.172 Cha3.2 ; Cha2.2 59.309,115.433 61.3,117.424 68.621,117.424 70.691,115.354 Cpwr2.2 LED1.2
  Bottom Layer w0.381: v1(167.386,102.489) 167.404,102.471 170.071,102.471 171.323,101.219 v1(171.323,99.695)
  Bottom Layer w0.635: Cha1.2 Cha1.2@62.611,91.44 ; IC.GND@69.723,103.924 IC.GND ; IC2.4 73.914,70.726 73.503,70.315 72.976,70.315 72.581,69.92 72.581,62.03 73.143,61.468 91.604,61.468 93.636,59.436 v1(109.982,59.436) 112.805,59.436 113.177,59.064 113.177,57.309 113.179,57.308 113.179,56.974 113.551,56.602 115.517,56.602 116.764,57.848 131,57.848 v1(146.304,73.152) ; v1(81.28,134.874) 108.585,134.874 112.268,138.557 115.181,138.557 115.186,138.562 115.956,138.562 v1(116.078,138.684) ; U?.47 143.129,82.94 143.501,83.312 v1(153.035,83.312) ; v1(162.306,83.566) 167.229,83.566 HALL2.5
  Bottom Layer w1: Cir21.2 CSEN21.2@63.192,64.389 ; Cpwr3.2 59.944,104.051 VR1.2 ; VR1.2@62.128,104.253 VR1.2 ; Cha1.2@62.611,91.44 64.262,93.091 64.262,102.119 VR1.2 ; CSEN11.2 CRC1.2 IC1.4 ; CSEN21.2 CRC2.2@68.272,64.262 ; Cpwr1.2@70.866,91.268 71.627,90.507 Dpwr2.1
  Bottom Layer w1.6: IN.2@43.194,98.171 IN.2@43.194,98.552 ; Cha3.2@52.245,106.172 52.969,105.448 Cpwr3.2@58.499,105.448 ; Cpwr3.2@58.547,105.496 58.547,113.909 59.309,114.671 Cha2.2
HIN11: Rbve11.2 U?.6 | length 42.2
  Top Layer w0.635: Rbve11.2 98.742,122.174 100.526,123.957 100.716,123.957 v1(100.838,124.079)
  Bottom Layer w0.635: v1(100.838,124.079) 100.952,123.965 103.59,123.965 103.962,123.593 103.962,120.762 104.334,120.391 132.212,120.391 U?.6
HIN12: Rbve12.2 U?.8 | length 33.7
  Top Layer w0.635: v1(100.965,122.174) Rbve12.2
  Bottom Layer w0.635: v1(100.965,122.174) 103.685,119.454 128.069,119.454 U?.8
HIN13: Rbve13.2 U?.30 | length 61.2
  Top Layer w0.635: Rbve13.2 107.087,122.148 107.087,120.831 105.71,119.454 93.891,119.454 92.329,117.892 92.329,113.779 92.509,113.6 92.509,113.576 93.891,112.194 128.069,112.194 U?.30
HIN21: Rbve21.2 U?.50 | length 53.1
  Top Layer w0.635: Rbve21.2 151.012,71.882 151.384,72.254 151.384,83.702 151.012,84.074 138.049,84.074 U?.50
HIN22: Rbve22.2 U?.73 | length 16.2
  Top Layer w0.635: Rbve22.2 124.46,72.009 125.679,73.228 132.597,73.228 132.969,73.6 U?.73
HIN23: Rbve23.2 U?.31 | length 109.7
  Top Layer w0.635: v1(88.519,76.581) 92.71,72.39 92.71,69.088 95.524,66.274 96.286,66.274 v1(96.393,66.167) ; v1(116.586,66.421) 116.586,71.51 116.958,71.882 Rbve23.2
  Bottom Layer w0.635: v1(88.519,76.581) 88.641,76.703 88.641,77.084 88.773,77.216 88.773,98.171 103.685,113.083 125.959,113.083 126.985,114.109 127.128,114.109 127.574,114.554 U?.31 ; v1(96.393,66.167) 116.332,66.167 v1(116.586,66.421)
HO11: RH11.1 U1.27 | length 50.2
  Top Layer w0.635: U1.27 103.378,141.596 103.75,141.224 110.49,141.224 111.125,141.859 133.604,141.859 RH11.1@145.417,153.672
HO12: RH12.1 U1.23 | length 12.4
  Top Layer w0.635: v1(108.077,147.574) 108.077,147.402 108.458,147.021 U1.23
  Bottom Layer w0.635: v1(108.077,147.574) 108.131,147.574 113.787,153.23 113.931,153.23 114.163,153.461 RH12.1@114.681,153.461
HO13: RH13.1 U1.19 | length 35.6
  Top Layer w0.635: RH13.1@85.09,153.035 87.249,150.876 113.166,150.876 113.538,150.504 U1.19
HO21: RH21.1 U2.27 | length 16.9
  Top Layer w0.635: U2.27 122.936,44.289 131.538,35.687 RH21.1
HO22: RH22.1 U2.23 | length 18.6
  Top Layer w0.635: RH22.1 111.633,35.56 117.856,41.783 U2.23
HO23: RH23.1 U2.19 | length 42.9
  Top Layer w0.635: RH23.1 81.915,41.656 v1(94.615,41.656) ; v1(112.776,41.656) U2.19
  Bottom Layer w0.635: v1(94.615,41.656) v1(112.776,41.656)
ITRIP1: "IC1 B.1" U1.9 U?.5 | length 57
  Top Layer w0.635: U1.9 112.268,136.48 112.522,136.734 v1(112.522,136.906)
  Bottom Layer w0.635: 93.091,132.621 93.322,132.621 93.339,132.604 108.22,132.604 v1(112.522,136.906) 118.237,136.906 U?.5
ITRIP2: IC2B.1 U2.9 U?.76 | length 62.1
  Top Layer w0.635: U2.9 114.046,57.299 114.384,57.637 v1(114.384,57.808) ; v1(120.904,63.881) 120.904,72.5 125.349,76.945 U?.76
  Bottom Layer w0.635: IC2B.1 93.98,64.34 94.352,63.969 94.451,63.969 95.117,63.303 95.117,61.205 95.488,60.833 113.694,60.833 114.066,60.461 114.066,58.298 114.384,57.98 v1(114.384,57.808) ; v1@114.384,57.491 115.149,57.491 120.782,63.124 120.782,63.759 v1(120.904,63.881)
"LED MOTOR 1": RLED1.2 U?.12 | length 62.3
  Bottom Layer w0.635: RLED1.2 80.264,106.283 80.636,106.655 80.869,106.655 81.724,107.51 81.724,118.194 86.086,122.555 97.826,122.555 101.816,118.565 118.798,118.565 U?.12
"LED MOTOR 2": RLED2.2 U?.62 | length 49.8
  Top Layer w0.635: RLED2.2 77.978,106.045 77.978,96.954 80.772,94.16 80.772,87.757 85.524,83.005 104.407,83.005 104.806,82.606 104.806,81.757 U?.62
LIN11: Rbve14.2 U?.7 | length 25.8
  Top Layer w0.635: Rbve14.2 110.807,122.174 111.252,122.618 111.252,122.682 112.078,123.507 127.173,123.507 132.746,117.935 132.746,117.317 U?.7
LIN12: Rbve15.2 U?.29 | length 88.4
  Top Layer w0.635: Rbve15.2 114.617,122.174 114.173,121.73 114.173,121.149 113.801,120.777 109.465,120.777 109.093,121.149 109.093,123.19 108.585,123.698 105.655,123.698 105.283,123.326 105.283,120.715 104.911,120.343 98.097,120.343 95.885,122.555 90.923,122.555 90.424,122.056 90.424,113.03 93.213,110.241 132.597,110.241 132.969,110.613 U?.29
LIN13: Rbve16.2 U?.35 | length 57.3
  Top Layer w0.635: U?.35 116.258,113.083 94.259,113.083 93.398,113.944 93.398,117.704 94.259,118.565 116.851,118.565 118.745,120.459 Rbve16.2
LIN21: Rbve24.2 U?.56 | length 66.7
  Top Layer w0.635: v1(90.17,84.455) 117.348,84.455 U?.56 ; v1(90.297,76.708) 90.395,76.61 91.174,76.61 97.236,70.549 111.552,70.549 112.886,71.882 Rbve24.2@114.745,71.882
  Bottom Layer w0.635: v1(90.17,84.455) 90.233,84.391 90.233,76.772 v1(90.297,76.708)
LIN22: Rbve25.2 U?.78 | length 14.4
  Top Layer w0.635: Rbve25.2 110.563,71.955 110.563,73.225 114.427,77.089 119.897,77.089 120.269,77.461 U?.78
LIN23: Rbve26.2 U?.41 | length 73.7
  Top Layer w0.635: Rbve26.2 v1(106.299,75.565)
  Bottom Layer w0.635: U?.41 102.303,114.554 100.552,112.804 83.185,95.436 83.185,76 83.811,75.374 92.655,75.374 92.909,75.629 106.236,75.629 v1(106.299,75.565)
LO11: RL11.1 U1.16 | length 21.1
  Top Layer w0.635: U1.16 117.348,143.209 117.72,142.837 124.295,142.837 129.413,147.955 RL11.1
LO12: RL12.1 U1.15 | length 27.4
  Top Layer w0.635: RL12.1@100.866,153.571 102.489,155.194 115.443,155.194 118.618,152.019 U1.15
LO13: RL13.2 U1.14 | length 67.8
  Top Layer w0.635: v1(98.552,140.081) 110.871,140.081 111.76,140.97 118.246,140.97 118.618,140.598 U1.14
  Bottom Layer w0.635: RL13.2 70.231,140.516 70.603,140.144 98.489,140.144 v1(98.552,140.081)
LO21: RL21.1 U2.16 | length 18.3
  Top Layer w0.635: v1(108.966,38.481) U2.16
  Bottom Layer w0.635: v1(108.966,38.481) 116.205,38.481 RL21.1
LO22: RL22.1 U2.15 | length 21.1
  Top Layer w0.635: RL22.1 94.49,35.56 104.015,45.085 U2.15
LO23: RL23.2 U2.14 | length 55.6
  Top Layer w0.635: RL23.2 68.293,35.687 77.119,44.514 100.393,44.514 107.696,51.816 U2.14
NetCir12_1: Cir12.1 U1.13 | length 76.8
  Top Layer w0.635: v1(117.348,132.207) U1.13
  Bottom Layer w0.635: Cir12.1 56.578,123.126 81.197,123.126 81.515,123.444 93.461,123.444 101.081,131.064 116.205,131.064 v1(117.348,132.207)
NetCir22_1: Cir22.1 U2.13 | length 64.4
  Top Layer w0.635: Cir22.1 53.721,58.166 76.701,58.166 77.018,58.483 108.594,58.483 108.966,58.112 U2.13
NetH11_1: H11.1 RH11.2 | length 6.4
  Top Layer w1: RH11.2 136.398,156.464 138.684,158.75 H11.1
NetH12_1: H12.1 RH12.2 | length 5.6
  Top Layer w1: H12.1@107.569,158.242 H12.1
  Bottom Layer w1: RH12.2@105.664,153.67 105.664,156.337 H12.1@107.569,158.242
NetH13_1: H13.1 RH13.2 | length 6.5
  Top Layer w1: RH13.2@76.2,153.67 76.2,157.226 78.105,159.131 H13.1
NetH21_1: H21.1 RH21.2 | length 7
  Top Layer w1: H21.1 142.494,29.718 144.399,31.623 RH21.2
NetH22_1: H22.1 RH22.2 | length 6.9
  Top Layer w1: H22.1 112.014,29.718 114.046,31.75 RH22.2
NetH23_1: H23.1 RH23.2 | length 7
  Top Layer w1: H23.1 82.423,29.718 84.709,32.004 RH23.2
"NetIC1 B_3": "IC1 B.3" IC1.1 Ropamp11.1 | length 36.3
  Top Layer w0.635: IC1.1 84.024,132.461 85,131.484 85.942,131.484 86.918,132.461 87.501,132.461 87.566,132.526 87.916,132.526 88.011,132.621
  Bottom Layer w0.635: Ropamp11.1 63.119,140.716 63.691,140.144 63.724,140.144 64.579,139.289 64.579,139.255 68.263,135.572 77.534,135.572 79.819,133.286 80.2,133.286 80.645,132.842 IC1.1
NetIC1_2: IC1.2 Ropamp11.2 Ropamp12.1 | length 31.8
  Top Layer w0.635: Ropamp12.1 53.194,139.192 54.146,140.144 61.658,140.144 Ropamp11.2
  Bottom Layer w0.635: Ropamp11.2 63.119,138.43 67.31,134.239 76.708,134.239 78.105,132.842 IC1.2
NetIC2_1: IC2.1 IC2B.3 Ropamp21.1 | length 45.4
  Top Layer w0.635: v1(73.279,59.372) 73.401,59.494 73.845,59.494 73.914,59.563 80.118,59.563 82.867,62.313 82.867,65.51 81.534,66.843 IC2.1 81.534,71.247 81.978,71.691 82.359,71.691 82.576,71.908 87.763,71.908 IC2B.3
  Bottom Layer w0.635: Ropamp21.1 73.279,56.769 v1(73.279,59.372)
NetIC2_2: IC2.2 Ropamp21.2 Ropamp22.1 | length 40.8
  Top Layer w0.635: Ropamp22.1 51.625,54.038 61.658,54.038 Ropamp21.2 ; v1(65.913,59.944) 71.954,59.944 72.581,60.571 72.581,64.179 78.994,70.593 IC2.2
  Bottom Layer w0.635: Ropamp21.2 63.119,59.436 63.627,59.944 v1(65.913,59.944)
NetL11_1: L11.1 RL11.2 | length 6.3
  Top Layer w1: RL11.2 120.523,156.845 122.428,158.75 L11.1
NetL11_3: L11.3 L12.3 L13.3 R11.1 RSEN11.2 RSEN12.2 | length 88.8
  Top Layer w1: R11.1 56.134,151.812 56.943,152.621 RSEN12.2 56.983,153.202 56.983,159.98 RSEN11.2 57.22,160.02 58.609,161.409 66.519,161.409 68.326,159.602 L13.3 74.753,159.385 76.777,161.409 96.364,161.409 98.806,158.967 L12.3 104.471,158.75 106.749,161.028 125.72,161.028 127.508,159.24 L11.3
NetL12_1: L12.1 RL12.2 | length 5.8
  Top Layer w1: RL12.2@91.948,153.67 91.948,156.718 93.726,158.496 L12.1
NetL13_1: L13.1 RL13.1 | length 6.5
  Top Layer w1: RL13.1 61.341,157.226 63.246,159.131 L13.1
NetL21_1: L21.1 RL21.2 | length 6.7
  Top Layer w1: L21.1 126.238,29.718 128.27,31.75 RL21.2
NetL21_3: L21.3 L22.3 L23.3 R21.1 RSEN21.2 RSEN22.2 | length 90.2
  Top Layer w1: R21.1 56.793,46.585 56.793,36.6 RSEN22.2 56.753,36.512 56.753,29.019 RSEN21.2 62.713,28.956 63.221,29.464 L23.3 63.246,26.772 63.832,26.186 91.743,26.186 92.329,26.772 L22.3
  Bottom Layer w1: L22.3 92.329,29.7 94.117,31.488 119.37,31.488 121.158,29.7 L21.3
NetL22_1: L22.1 RL22.2 | length 6.9
  Top Layer w1: L22.1 97.409,29.718 99.441,31.75 RL22.2
NetL23_1: L23.1 RL23.1 | length 7.1
  Top Layer w1: L23.1 68.326,29.718 70.358,31.75 RL23.1
NetLED1_1: LED1.1 RLED1.1 | length 5
  Top Layer w1.6: LED1.1 79.502,108.925 80.264,108.163 RLED1.1
NetLED2_1: LED2.1 RLED2.1 | length 7.3
  Top Layer w1: RLED2.1 75.96,99.173 75.96,96.925 LED2.1
NetRbve11_1: Rbve11.1 U1.2 | length 13.4
  Top Layer w0.635: Rbve11.1 98.679,130.057 99.051,130.429 102.362,130.429 103.378,131.445 U1.2
NetRbve12_1: Rbve12.1 U1.3 | length 10.2
  Top Layer w0.635: Rbve12.1 103.124,129.388 104.648,130.912 U1.3
NetRbve13_1: Rbve13.1 U1.4 | length 10
  Top Layer w0.635: U1.4 105.918,130.175 107.061,129.032 Rbve13.1
NetRbve14_1: Rbve14.1 U1.5 | length 11
  Top Layer w0.635: U1.5 107.188,130.937 110.744,127.381 Rbve14.1
NetRbve15_1: Rbve15.1 U1.6 | length 13.2
  Top Layer w0.635: U1.6 108.458,131.445 112.395,127.508 114.309,127.508 114.681,127.136 Rbve15.1
NetRbve16_1: Rbve16.1 U1.7 | length 16.5
  Top Layer w0.635: U1.7 109.728,131.826 112.776,128.778 118.373,128.778 118.745,128.406 Rbve16.1
NetRbve17_1: Rbve17.1 U1.8 | length 19.2
  Top Layer w0.635: U1.8 110.998,132.152 113.229,129.921 121.802,129.921 122.174,129.549 Rbve17.1
NetRbve18_1: Rbve18.1 U1.10 | length 21.5
  Top Layer w0.635: U1.10 113.538,132.579 115.116,131 125.993,131 126.365,130.629 Rbve18.1
NetRbve21_1: Rbve21.1 U2.2 | length 17.7
  Top Layer w0.635: U2.2 122.936,60.871 123.308,61.243 126.628,61.243 127,61.615 Rbve21.1
NetRbve22_1: Rbve22.1 U2.3 | length 14.7
  Top Layer w0.635: U2.3 121.666,61.468 122.809,62.611 Rbve22.1
NetRbve23_1: Rbve23.1 U2.4 | length 14.7
  Top Layer w0.635: Rbve23.1 118.999,62.443 120.396,61.046 U2.4
NetRbve24_1: Rbve24.1 U2.5 | length 15.9
  Top Layer w0.635: Rbve24.1 114.808,64.643 119.126,60.325 U2.5
NetRbve25_1: Rbve25.1 U2.6 | length 17.1
  Top Layer w0.635: Rbve25.1 110.49,66.929 117.856,59.563 U2.6
NetRbve26_1: Rbve26.1 U2.7 | length 20.3
  Top Layer w0.635: Rbve26.1 106.372,68.634 106.372,66.126 106.743,65.754 109.76,65.754 114.141,61.373 116.586,58.928 U2.7
NetRbve27_1: Rbve27.1 U2.8 | length 24.1
  Top Layer w0.635: Rbve27.1 102.108,64.888 102.48,64.516 109.383,64.516 115.59,58.308 115.59,57.309 115.339,57.058 115.339,56.585 115.316,56.562 U2.8
NetRbve28_1: Rbve28.1 U2.10 | length 26.2
  Top Layer w0.635: Rbve28.1 98.044,63.364 98.416,62.992 108.204,62.992 112.776,58.42 U2.10
RCIN1: CRC1.1 RC1.1 U1.11 | length 63.7
  Top Layer w0.635: CRC1.1 66.646,131.093 66.646,137.258 RC1.1 ; v1(114.803,139.763) 114.808,139.758 U1.11
  Bottom Layer w0.635: RC1.1 68.215,138.811 70.564,136.462 108.521,136.462 111.823,139.763 v1(114.803,139.763)
RCIN2: CRC2.1 RC2.1 U2.11 | length 53.7
  Top Layer w0.635: CRC2.1 CRC2.1@68.561,61.487 ; RC2.1 68.926,55.153 68.926,54.438 69.388,53.975 v1(73.152,53.975) ; v1(111.083,56.769) 111.083,56.597 111.506,56.174 U2.11
  Bottom Layer w0.635: RC2.1@68.561,55.518 CRC2.1@68.561,61.487 ; v1(73.152,53.975) 82.453,53.975 82.517,53.911 85.377,53.911 85.441,53.975 85.476,53.975 88.933,57.433 94.846,57.433 95.51,56.769 v1(111.083,56.769)
"SENSE 11": HALL1.1 LOGIC.18 | length 29
  Top Layer w0.381: HALL1.1 171.607,122.779 171.83,122.556 171.83,102.517 169.654,100.341 169.274,100.341 168.597,99.663 LOGIC.18
"SENSE 11 3.3V": LOGIC.2 U?.19 | length 106.8
  Top Layer w0.381: v1@165.1,111.76 168.91,111.76 169.246,111.424 LOGIC.2
  Top Layer w0.635: v1(91.694,121.349) 91.572,121.227 91.572,120.792 91.44,120.659 91.44,113.411 91.62,113.231 91.62,113.208 93.523,111.305 128.27,111.305 128.292,111.326 130.053,111.326 v1(130.175,111.448)
  Bottom Layer w0.635: v1(91.694,121.349) 97.776,121.349 101.585,117.539 101.728,117.539 102.174,117.094 U?.19 ; v1(130.175,111.448) 130.347,111.448 130.659,111.76 v1@165.1,111.76
  other v1: 165.608,111.76
"SENSE 12": HALL1.2 LOGIC.17 | length 36.3
  Top Layer w0.381: LOGIC.17 167.947,99.911 169.011,100.976 169.391,100.976 171.195,102.78 171.195,105.404 171.181,105.418 171.181,119.919 170.958,120.142 165.577,120.142 165.354,120.365 165.354,123.104 HALL1.2
"SENSE 12 3.3V": LOGIC.3 U?.20 | length 107.6
  Top Layer w0.381: v1(165.648,110.169) 168.373,110.169 168.596,109.946 LOGIC.3
  Top Layer w0.635: v1(88.519,120.777) 89.408,119.888 89.408,112.776 92.9,109.283 133.726,109.283 133.795,109.352 134.244,109.352 v1(134.366,109.474)
  Bottom Layer w0.635: v1(88.519,120.777) 90.559,120.777 91.194,120.142 96.901,120.142 U?.20 ; v1(134.366,109.474) 134.538,109.474 135.554,110.49 164.997,110.49
"SENSE 13": HALL1.3 LOGIC.16 | length 40
  Top Layer w0.381: LOGIC.16 167.296,100.159 168.748,101.611 169.128,101.611 170.531,103.014 170.531,103.262 170.546,103.277 170.546,105.155 170.531,105.17 170.531,119.03 170.308,119.253 164.942,119.253 164.719,119.476 164.719,125.969 HALL1.3
"SENSE 13 3.3V": LOGIC.4 U?.21 | length 105.9
  Top Layer w0.381: v1@165.1,108.458 167.723,108.458 167.946,108.235 LOGIC.4@167.946,104.216
  Top Layer w0.635: v1(86.487,119.253) 87.63,119.253 88.519,118.364 88.519,112.268 92.676,108.111 v1(135.048,108.111)
  Bottom Layer w0.635: v1(86.487,119.253) 95.25,119.253 U?.21 ; v1(135.048,108.111) 135.179,108.111 136.236,109.167 164.975,109.167
  other v1: 165.608,108.458
"SENSE 21": HALL2.1 LOGIC.14 | length 32.5
  Top Layer w0.381: LOGIC.14 165.996,76.339 166.219,76.116 169.957,76.116 170.224,75.849 170.224,72.192 169.957,71.926 169.589,71.926 HALL2.1
"SENSE 21 3.3V": LOGIC.6 U?.51 | length 54.5
  Top Layer w0.381: v1(165.608,106.426) 166.646,105.388 LOGIC.6
  Bottom Layer w0.635: U?.51 133.284,81.534 136.459,84.709 159.131,84.709 162.634,88.212 162.634,99.261 165.608,102.235 v1(165.608,106.426)
"SENSE 22": HALL2.2 LOGIC.13 | length 27.6
  Top Layer w0.381: LOGIC.13 165.346,74.277 165.569,74.053 168.216,74.053 HALL2.2
"SENSE 22 3.3V": LOGIC.7 U?.52 | length 54
  Top Layer w0.381: U?.52 133.985,85.09 162.337,85.09 163.195,85.948 163.195,99.178 163.397,99.38 163.397,99.415 165.996,102.015 LOGIC.7
"SENSE 23": HALL2.3 LOGIC.12 | length 27
  Top Layer w0.381: v1(162.306,81.661) 164.358,81.661 164.696,81.999 LOGIC.12
  Bottom Layer w0.635: v1(162.306,81.661) 166.101,77.866 HALL2.3@168.768,77.866
"SENSE 23 3.3V": LOGIC.8 U?.53 | length 55.5
  Top Layer w0.381: U?.53 132.133,85.778 161.724,85.778 162.332,86.386 162.332,99.34 165.346,102.354 LOGIC.8
U1: C11.2 H11.3 J1.1 L11.2 U1.26 | length 116.1
  Top Layer w0.635: C11.2 100.241,145.961 104.276,145.961 104.648,145.589 U1.26 ; H11.3 146.177,159.004 147.066,158.115 147.066,146.605 147.438,146.233 J1.1@168.714,146.233
  Bottom Layer w0.635: C11.2 92.564,138.068 92.964,138.068 93.11,137.922 100.965,137.922 115.252,152.209 115.286,152.209 116.141,153.065 116.141,153.099 120.206,157.162 123.681,157.162 124.015,157.497 124.015,157.68 124.968,158.632 L11.2@124.968,158.75 ; L11.2 L11.2@124.968,158.75 ; H11.3@143.764,158.496 H11.3@143.764,158.75 ; H11.3 H11.3@143.764,158.75 ; L11.2@124.968,158.75 126.555,157.162 142.177,157.162 H11.3@143.764,158.75
U2: C21.2 H21.3 J2.1 L21.2 U2.26 | length 119.4
  Top Layer w0.635: v1(122.809,51.118) 122.809,48.641 121.666,47.498 U2.26 121.666,38.429 123.698,36.397 L21.2
  Top Layer w1: L21.2 123.895,29.267 123.895,28.454 124.91,27.44 135.626,27.44 137.414,29.228 H21.3
  Bottom Layer w0.635: C21.2 96.774,51.308 122.17,51.308 122.238,51.239 122.687,51.239 v1(122.809,51.118) ; v1@122.809,51.308 126.731,55.23 J2.1
V1: C12.2 H12.3 J1.2 L12.2 U1.22 | length 118.6
  Top Layer w0.635: L12.2@96.266,158.496 98.108,156.654 111.061,156.654 H12.3@112.649,158.242 ; v1(103.251,148.717) 103.314,148.78 108.577,148.78 109.728,147.629 v1(109.728,142.494)
  Bottom Layer w0.635: C12.2 99.441,148.717 v1(103.251,148.717) 103.251,148.844 112.649,158.242 H12.3 ; L12.2@96.266,158.496 L12.2 ; v1(109.728,142.494) 113.593,142.494 120.832,149.733 J1.2
V2: C22.2 H22.3 J2.2 L22.2 U2.22 | length 138
  Top Layer w0.635: H22.3 103.696,32.702 103.696,34.955 103.695,36.165 104.551,37.02 111.367,37.02 116.586,42.239 U2.22 116.586,48.387 v1(116.967,48.768)
  Top Layer w1: L22.2 95.066,29.267 95.066,28.454 96.081,27.44 105.146,27.44 106.934,29.228 H22.3
  Bottom Layer w0.635: C22.2 92.739,50.009 92.739,32.373 90.742,30.376 90.742,28.552 91.671,27.622 92.987,27.622 94.828,29.464 L22.2 ; v1(116.967,48.768) 170.062,48.768 170.434,49.14 170.434,56.633 168.266,58.801 J2.2@168.529,58.801
VB11: C11.1 D11.2 U1.28 | length 23.3
  Top Layer w0.635: C11.1 91.694,136.398 92.583,136.398 101.083,144.898 102.057,144.898 102.108,144.847 U1.28
  Top Layer w1: D11.2 89.735,138.303 89.862,138.176 C11.1
VB12: C12.1 D12.2 U1.24 | length 28.1
  Top Layer w0.635: C12.1 92.808,144.624 94.078,144.624 96.647,147.193 106.753,147.193 107.124,146.821 107.124,146.058 107.188,145.995 U1.24
  Top Layer w1: D12.2@83.707,142.353 90.257,142.353 90.332,142.278 90.354,142.278 C12.1@90.37,142.294
VB13: C13.1 D13.2 U1.20 | length 36.4
  Top Layer w0.635: C13.1 90.368,146.756 91.294,146.756 91.665,146.384 91.665,146.2 92.352,145.513 93.322,145.513 97.732,149.923 111.706,149.923 112.268,149.361 U1.20
  Top Layer w1: D13.2 83.731,146.647 90.117,146.647 C13.1@90.205,146.647
VB21: C21.1 D21.2 U2.28 | length 49.7
  Top Layer w0.635: D21.2 87.128,56.642 88.681,55.089 93.189,55.089 C21.1 ; v1(122.373,52.578) 122.494,52.456 123.177,52.456 124.206,51.427 U2.28
  Bottom Layer w0.635: C21.1 98.044,52.578 v1(122.373,52.578)
VB22: C22.1 D22.2 U2.24 | length 44.6
  Top Layer w0.635: D22.2 84.328,52.197 91.18,52.197 91.209,52.226 92.179,52.226 92.208,52.197 93.091,52.197 C22.1 ; U2.24 119.126,47.117 121.29,49.281 121.29,49.916 v1(121.412,50.038)
  Bottom Layer w0.635: C22.1 95.25,50.038 v1(121.412,50.038)
VB23: C23.1 D23.2 U2.20 | length 34.4
  Top Layer w0.635: D23.2 83.693,46.799 84.201,47.307 84.645,47.307 85.119,47.781 92.935,47.781 C23.1 ; v1(113.919,47.498) 113.919,47.326 114.046,47.199 U2.20
  Bottom Layer w0.635: C23.1 112.858,46.609 113.747,47.498 v1(113.919,47.498)
"Vin LOGIC": LOGIC.20 U?.45 | length 32.6
  Top Layer w0.381: LOGIC.20 169.896,94.768 170.688,93.976 v1(170.688,93.853)
  Bottom Layer w0.381: U?.45 157.734,81.534 165.183,88.983 165.183,89.038 169.844,93.698 170.533,93.698 v1(170.688,93.853)
"Vin VĐK": Cpwr4.1 Cpwr5.1 Cpwr6.1 Dpwr1.2 Dpwr2.2 HALL1.4 HALL2.4 IC1.8 IC2.8 Rhp.2 U?.1 | length 263.1
  Top Layer w0.635: Rhp.2 54.229,83.183 Cpwr6.1 Cpwr5.1 Cpwr4.1 69.153,79.627 71.183,77.597 Dpwr2.2 Dpwr2.2@71.691,77.534 ; IC1.8 80.645,124.219 81.724,123.14 81.724,110.808 ; v1(81.724,97.155) 81.724,110.808 ; U?.1 149.68,115.623 149.68,110.183 148.664,109.167 148.615,109.167 142.191,102.743 89.789,102.743 81.724,110.808 ; HALL2.4@168.294,81.131 173.736,86.573 173.736,132.907 173.364,133.279 HALL1.4
  Bottom Layer w0.635: Dpwr2.2@71.691,77.534 Dpwr1.2@76.391,77.534 ; Dpwr1.2 Dpwr1.2@76.898,77.47 ; IC1.8@80.645,124.701 IC1.8 ; IC2.8 81.534,63.386 82.161,64.014 82.302,64.014 82.867,64.579 82.867,73.215 78.613,77.47 Dpwr1.2@76.898,77.47 ; v1(81.724,97.155) 81.724,82.296 Dpwr1.2@76.898,77.47 ; U?.1 164.394,133.279 HALL1.4
VS13: C13.2 H13.3 J1.3 L13.2 U1.18 | length 127.2
  Top Layer w0.635: H13.3 83.185,152.875 87.978,148.082 91.44,148.082 C13.2 ; v1(103.505,152.527) 103.559,152.527 104.194,151.892 113.407,151.892 114.808,150.491 114.808,145.415 ; U1.18 114.808,145.415 ; v1(116.586,147.193) 114.808,145.415
  Bottom Layer w0.635: L13.2 65.786,159.131 67.373,157.543 81.597,157.543 83.185,159.131 H13.3 ; C13.2 98.044,151.892 102.816,151.892 103.451,152.527 v1(103.505,152.527) ; v1(116.586,147.193) 122.626,153.233 127.657,153.233 128.808,152.082 145.893,152.082 147.044,153.233 J1.3
VS23: C23.2 H23.3 J2.3 L23.2 U2.18 | length 176.1
  Top Layer w0.635: H23.3 77.343,30.096 77.829,30.582 77.829,30.746 86.835,39.751 v1(94.615,39.751) ; U2.18 111.557,45.034 111.557,39.954 v1(111.633,39.878)
  Top Layer w1: L23.2 65.983,29.267 65.983,28.454 66.998,27.44 75.555,27.44 77.343,29.228 H23.3
  Bottom Layer w0.635: v1(94.615,39.751) 111.057,39.751 111.062,39.756 111.511,39.756 v1(111.633,39.878) 111.755,39.756 112.173,39.756 112.322,39.607 171.332,39.607 171.704,39.979 171.704,60.109 169.94,61.873 168.886,61.873 J2.3
  Bottom Layer w1: H23.3 74.772,29.464 73.824,30.413 73.824,37.375 80.78,44.331 90.981,44.331 91.567,44.917 C23.2
pads on no net: "IC1 B.4" "IC1 B.5" "IC1 B.6" "IC1 B.7" "IC1 B.8" IC1.5 IC1.6 IC1.7 IC2.5 IC2.6 IC2.7 IC2B.4 IC2B.5 IC2B.6 IC2B.7 IC2B.8 LOGIC.5 LOGIC.9 LOGIC.11 LOGIC.15 U1.17 U1.21 U1.25 U2.17 U2.21 U2.25 U?.2 U?.3 U?.4 U?.11 U?.13 U?.14 U?.15 U?.16 U?.17 U?.18 U?.22 U?.23 U?.24 U?.25 U?.26 U?.27 U?.28 U?.32 U?.33 U?.34 U?.36 U?.37 U?.38 U?.39 U?.40 U?.42 U?.43 U?.44 U?.46 U?.48 U?.49 U?.54 U?.55 U?.57 U?.58 U?.59 U?.60 U?.61 U?.63 U?.64 U?.65 U?.66 U?.67 U?.68 U?.69 U?.70 U?.71 U?.72 U?.77 U?.79 U?.80 U?.81 U?.82 U?.83 U?.84 U?.85 U?.86 U?.87 U?.88 U?.89 U?.90 U?.91 U?.92 U?.93 U?.94 U?.95 U?.96 U?.97 U?.98 U?.99 U?.100 U?.101

## Keep-outs
Top Layer:
  lines w0.254: 22.352,24.638 ccw(c23.622,24.638) 23.622,23.368 179.197,23.368 ccw(c179.197,24.638) 180.467,24.638 180.467,165.227 ccw(c179.197,165.227) 179.197,166.497 23.622,166.497 ccw(c23.622,165.227) 22.352,165.227 22.352,27.051 22.352,24.638

## Text inside footprints (layer, text, board x,y; h text height)
IC: Mechanical 13 "O" at 71.124,105.704 h1.27 r90; Mechanical 13 "I" at 71.123,100.62 h1.27 r90; Mechanical 13 "-" at 71.122,103.162 h1.27 r90